# Altium PCB SQUIDCtr_Rev1.PcbDoc (part 3 of 4)
Units mil, origin at the board's own origin, x right, y up, seen from the top; angles counter-clockwise.
Board outline 5863.43 x 2940 mil, 6 copper layers (Top Layer, Internal Plane 1, Mid-Layer 1, InternalPlane 2, Mid-Layer 2, Bottom Layer), stack 62.5 mil thick; 614 components, 341 nets, 1601 pads, 475 vias.
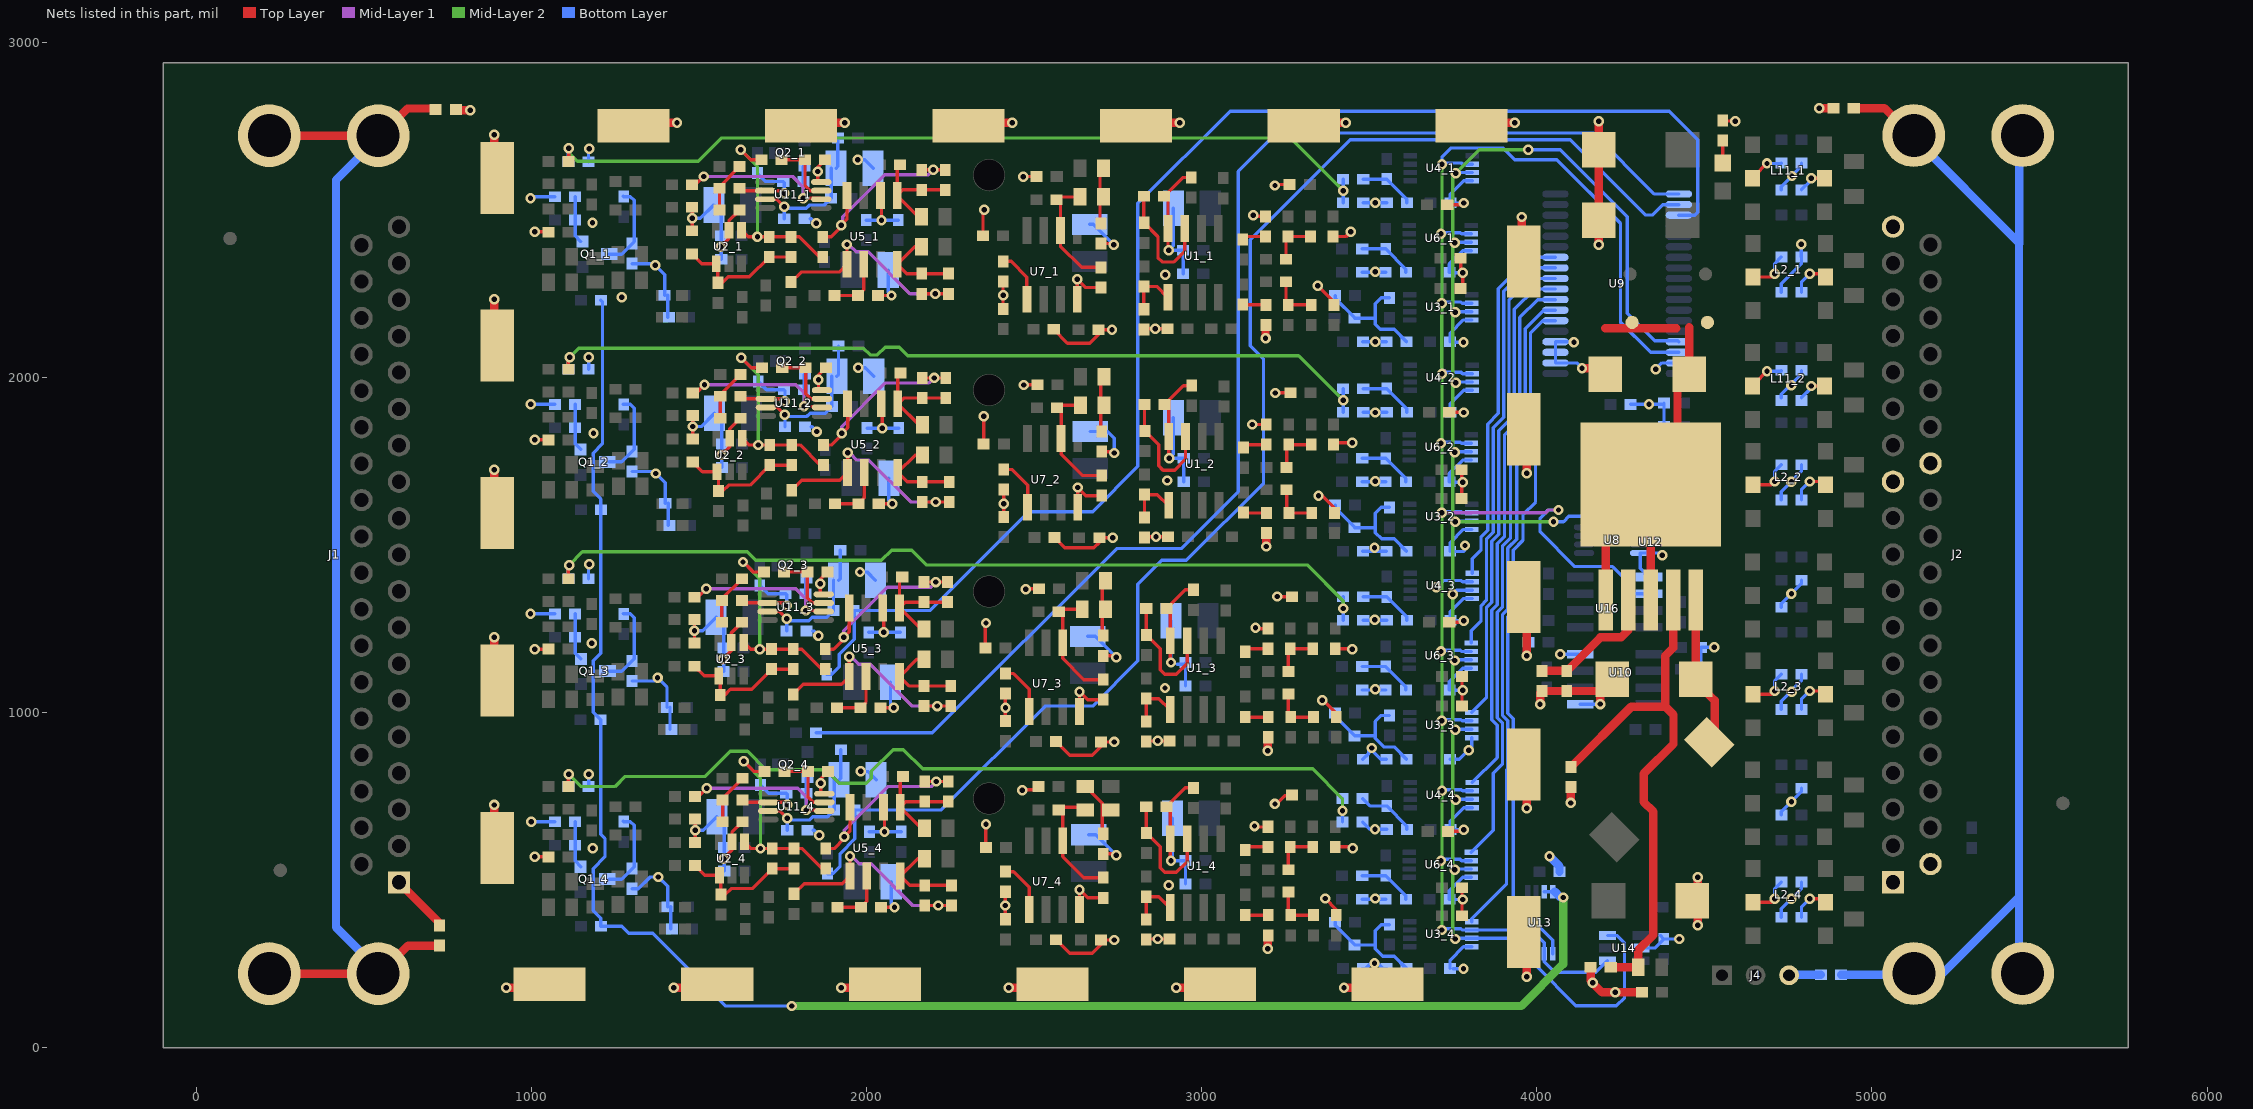
[diagram p7: the nets of this part, all layers, seen from the top]

## Via types
v1: diameter 31, hole 16, Top Layer to Bottom Layer, tented both sides, 475 vias

## Nets (pads, with @x,y where several pads share a name; then routed paths per layer and width w, separated by ;. In a path a pad name is that pad's centre, name@x,y a point inside that pad or via, vN(x,y) a via of type N, cw(c..) or ccw(c..) an arc to the next point about the centre after c; other vN are vias at no path point) (continued)
ENCH3.ENFEEDBACK: R33_3.2 R74_3.1 U9.21 | length 4137.8
  Bottom Layer w10: R74_3.1@1882,1115 1897,1115 1919.39,1137.39 1919.39,1174.86 1963.5,1218.98 R33_3.2@1963.5,1303.5 ; R33_3.2@1962,1305 2189,1305 2484,1600 2675,1600 2810,1735 2810,2520 3085,2795 4395,2795 4480,2710 4480,2492.72 4472.01,2484.72 U9.21@4424.06,2484.72
ENCH3.ENFLUXBIAS: U4_3.5 U9.12 | length 1090.6
  Bottom Layer w10: U4_3.5@3807.5,1416 3807.5,1459.93 3834,1486.43 3834,1524.76 3854,1544.76 3854,1861.5 3885.5,1893 3885.5,2264.99 3979.25,2358.74 U9.12@4055.94,2358.74
ENCH3.ENOFFSET: U6_3.5 U9.11 | length 1273.5
  Bottom Layer w10: U6_3.5@3804.5,1208 3804.5,1244.5 3834,1274 3834,1319.76 3850,1335.76 3850,1518.14 3870,1538.14 3870,1850 3901.5,1881.5 3901.5,2258.36 3970.38,2327.24 U9.11@4055.94,2327.24
ENCH3.ENSQUIDBIAS: U3_3.5 U9.10 | length 1442.1
  Bottom Layer w10: U3_3.5@3806.5,1001 3850,1044.5 3850,1313.14 3866,1329.14 3866,1511.51 3887,1532.51 3887,1842 3917.5,1872.5 3917.5,2232.5 3980.75,2295.75 U9.10@4055.94,2295.75
ENCH4.DISCHARGE: R34_4.1 U9.19 | length 3950.4
  Bottom Layer w10: R34_4.1@1850,940 2197,940 2747,1490 2940,1490 3110,1660 3110,2615 3225,2730 4168.94,2730 4351.22,2547.72 U9.19@4424.06,2547.72
ENCH4.ENFEEDBACK: R33_4.2 R74_4.1 U9.20 | length 4241.6
  Bottom Layer w10: R74_4.1@1884,520 1899,520 1921.39,542.39 1921.39,579.86 1965.5,623.98 R33_4.2@1965.5,708.5 ; R33_4.2@1964,710 2224,710 2534,1020 2675,1020 2810,1155 2810,1383.83 2881.17,1455 2955,1455 3185,1685 3185,2055.37 3145,2095.37 3145,2411 3444,2710 4100,2710 4325,2485 4345,2485 4376.22,2516.22 U9.20@4424.06,2516.22
ENCH4.ENFLUXBIAS: U4_4.5 U9.9 | length 1624.6
  Bottom Layer w10: U4_4.5@3807.5,792 3882,866.5 3882,962.49 3866,978.49 3866,1306.51 3882,1322.51 3882,1504.88 3904,1526.88 3904,1829 3933.5,1858.5 3933.5,2203.5 3994.25,2264.25 U9.9@4055.94,2264.25
ENCH4.ENOFFSET: U6_4.5 U9.8 | length 1797.3
  Bottom Layer w10: U6_4.5@3804.5,584 3870,649.5 3870,820 3898,848 3898,969.12 3882,985.12 3882,1299.88 3898,1315.88 3898,1498.25 3922,1522.25 3922,1822 3949.5,1849.5 3949.5,2179.5 4002.76,2232.76 U9.8@4055.94,2232.76
ENCH4.ENSQUIDBIAS: U3_4.5 U9.7 | length 1961.2
  Bottom Layer w10: U3_4.5@3806.5,377 3806.5,386 3910,489.5 3910,830 3914,834 3914,975.75 3898,991.75 3898,1293.25 3914,1309.25 3914,1491.63 3940,1517.63 3940,1810 3965.5,1835.5 3965.5,2145.5 4021.26,2201.26 U9.7@4055.94,2201.26
ENHEATER: U9.6 U13.5 | length 2037.9
  Bottom Layer w10: U13.5@4048,281 4048,322 3930,440 3930,982.37 3914,998.37 3914,1286.63 3930,1302.63 3930,1485 3959,1514 3959,1591.25 3996.5,1628.75 3996.5,1743.5 3981.5,1758.5 3981.5,2133.55 4017.71,2169.76 U9.6@4055.94,2169.76
FLUX_BIAS_FILTERED_1: C26_1.1 C46_1.1 R23_1.2 R38_1.1 | length 2578.5
  Top Layer w10: R38_1.1@1111,2645 1112,2646 v1(1112,2684)
  Mid-Layer 2 w10: v1(1112,2684) 1112,2671 1138,2645 1498,2645 1568,2715 3264.5,2715 v1(3422.5,2557)
  Bottom Layer w10: C26_1.1@1111,2644 1111,2683 v1(1112,2684) ; C46_1.1@3422.5,2522 v1(3422.5,2557) R23_1.2@3422.5,2592
FLUX_BIAS_FILTERED_2: C26_2.1 C46_2.1 R23_2.2 R38_2.1 | length 2547.3
  Top Layer w10: R38_2.1@1111,2025 1111,2057 v1(1115,2061)
  Mid-Layer 2 w10: v1(1115,2061) 1141.5,2087.5 1991.02,2087.5 2011.02,2067.5 2032.98,2067.5 2055.98,2090.5 2097.98,2090.5 2123.48,2065 3289.5,2065 v1(3422.5,1932)
  Bottom Layer w10: C26_2.1@1111,2025 1111,2057 v1(1115,2061) ; C46_2.1@3422.5,1897 v1(3422.5,1932) R23_2.2@3422.5,1967
FLUX_BIAS_FILTERED_3: C26_3.1 C46_3.1 R23_3.2 R38_3.1 | length 2585.8
  Top Layer w10: R38_3.1@1111,1400 1111,1438 v1(1113,1440)
  Mid-Layer 2 w10: v1(1113,1440) 1153,1480 1645,1480 1670,1455 2045,1455 2075,1485 2135,1485 2179,1441 3315,1441 3422.5,1333.5 v1(3422.5,1311)
  Bottom Layer w10: C26_3.1@1111,1400 1111,1438 v1(1113,1440) ; C46_3.1@3422.5,1276 v1(3422.5,1311) R23_3.2@3422.5,1346
FLUX_BIAS_FILTERED_4: C26_4.1 C46_4.1 R23_4.2 R38_4.1 | length 2703.9
  Top Layer w10: R38_4.1@1111,780 1111,816 v1(1112,817) ; v1(3420.5,708) v1@3422.5,710
  Mid-Layer 2 w10: v1(1112,817) 1149,780 1250,780 1280,810 1519,810 1594,885 1645.5,885 1700.5,830 1879,830 1919,790 2000,790 2015,805 2015,825 2080,890 2110,890 2167.5,832.5 3332,832.5 3420.5,744 v1(3420.5,708)
  Bottom Layer w10: C26_4.1@1111,780 1112,781 v1(1112,817) ; C46_4.1@3420.5,674 v1(3420.5,708) R23_4.2@3420.5,744
GND: C1.1 C2.1 C4.1 C5_1.1 C5_2.1 C5_3.1 C5_4.1 C6_1.1 C6_2.1 C6_3.1 C6_4.1 C7_1.1 C7_2.1 C7_3.1 C7_4.1 C8_1.1 C8_2.1 C8_3.1 C8_4.1 C9_1.1 C9_2.1 C9_3.1 C9_4.1 C10.1 C11_1.2 C11_2.2 C11_3.2 C11_4.2 C12_1.2 C12_2.2 C12_3.2 C12_4.2 C13_1.2 C13_2.2 C13_3.2 C13_4.2 C14_1.1 C14_2.1 C14_3.1 C14_4.1 C15_1.2 C15_2.2 C15_3.2 C15_4.2 C16_1.1 C16_2.1 C16_3.1 C16_4.1 C17_1.1 C17_2.1 C17_3.1 C17_4.1 C18_1.1 C18_2.1 C18_3.1 C18_4.1 C19_1.1 C19_2.1 C19_3.1 C19_4.1 C20_1.1 C20_2.1 C20_3.1 C20_4.1 C21_1.1 C21_2.1 C21_3.1 C21_4.1 C22.1 C24.2 C25.2 C26_1.2 C26_2.2 C26_3.2 C26_4.2 C27.2 C28.2 C29.2 C30.1 C31.1 C32.1 C35_1.2 C35_2.2 C35_3.2 C35_4.2 C36_1.1 C36_2.1 C36_3.1 C36_4.1 C37_1.1 C37_2.1 C37_3.1 C37_4.1 C38_1.1 C38_2.1 C38_3.1 C38_4.1 C39_1.1 C39_2.1 C39_3.1 C39_4.1 C41_1.1 C41_2.1 C41_3.1 C41_4.1 C42_1.1 C42_2.1 C42_3.1 C42_4.1 C44.1 C45_1.1 C45_2.1 C45_3.1 C45_4.1 C46_1.2 C46_2.2 C46_3.2 C46_4.2 C47_1.1 C47_2.1 C47_3.1 C47_4.1 C48_1.1 C48_2.1 C48_3.1 C48_4.1 C49_1.2 C49_2.2 C49_3.2 C49_4.2 C50_1.2 C50_2.2 C50_3.2 C50_4.2 C51_1.2 C51_2.2 C51_3.2 C51_4.2 C52_1.1 C52_2.1 C52_3.1 C52_4.1 C53_1.1 C53_2.1 C53_3.1 C53_4.1 C54_1.1 C54_2.1 C54_3.1 C54_4.1 C55.1 C56.1 C57.1 C58_1.2 C58_2.2 C58_3.2 C58_4.2 C59_1.2 C59_2.2 C59_3.2 C59_4.2 C60_1.1 C60_2.1 C60_3.1 C60_4.1 C61_1.2 C61_2.2 C61_3.2 C61_4.2 C62_1.2 C62_2.2 C62_3.2 C62_4.2 C63_1.1 C63_2.1 C63_3.1 C63_4.1 C64_1.1 C64_2.1 C64_3.1 C64_4.1 C65_1.1 C65_2.1 C65_3.1 C65_4.1 C66_1.1 C66_2.1 C66_3.1 C66_4.1 C67_1.1 C67_2.1 C67_3.1 C67_4.1 C68_1.1 C68_2.1 C68_3.1 C68_4.1 C69_1.1 C69_2.1 C69_3.1 C69_4.1 J1.1 J2.1 J2.12 J2.19 J2.20 J2.31 J4.3 R9_1.2 R9_2.2 R9_3.2 R9_4.2 R16.2 R17.1 R32.2 R42.1 R43_1.2 R43_2.2 R43_3.2 R43_4.2 R46_1.2 R46_2.2 R46_3.2 R46_4.2 R47_1.1 R47_2.1 R47_3.1 R47_4.1 R48_1.2 R48_2.2 R48_3.2 R48_4.2 R65_1.1 R65_2.1 R65_3.1 R65_4.1 R66.1 R68.1 R73.1 R77_1.1 R77_2.1 R77_3.1 R77_4.1 R78_1.2 R78_2.2 R78_3.2 R78_4.2 R79_1.1 R79_2.1 R79_3.1 R79_4.1 R80_1.2 R80_2.2 R80_3.2 R80_4.2 R85.2 SH1.1 SH2.1 SH3.1 SH4.1 SH5.1 SH6.1 SH8.1 SH9.1 SH10.1 SH11.1 SH12.1 SH13.1 SH14.1 SH16.1 SH17.1 SH18.1 SH19.1 SH20.1 SH21.1 SH22.1 SH23.1 SH24.1 U1_1.4 U1_2.4 U1_3.4 U1_4.4 U2_1.2 U2_2.2 U2_3.2 U2_4.2 U3_1.8 U3_2.8 U3_3.8 U3_4.8 U4_1.8 U4_2.8 U4_3.8 U4_4.8 U5_1.6 U5_2.6 U5_3.6 U5_4.6 U6_1.8 U6_2.8 U6_3.8 U6_4.8 U7_1.4 U7_2.4 U7_3.4 U7_4.4 U8.4 U9.2 U9.3 U9.4 U9.35 U10.5 U10.8 U11_1.4 U11_2.4 U11_3.4 U11_4.4 U13.8 U14.2 U16.5 | length 21040.5
  Top Layer w10: R73.1@726.57,365 R73.1@726.57,372.72 ; v1(1011,570) R48_4.2@1051,570 ; v1(1011,1190) R48_3.2@1051,1190 ; v1(1011,1815) R48_2.2@1051,1815 ; v1(1011,2435) R48_1.2@1051,2435 ; C9_1.1@1480,2438 v1(1480,2475) C8_1.1@1480,2508 ; C9_2.1@1482,1817 v1(1482,1854) C8_2.1@1482,1887 ; C9_3.1@1487,1208 v1(1487,1245) C8_3.1@1487,1278 ; C9_4.1@1489,613 v1(1489,650) C8_4.1@1489,683 ; v1(1565,2390) 1590,2415 U2_1.2@1590,2440 1590,2468 C35_1.2@1622,2500 ; v1(1567,1769) 1592,1794 U2_2.2@1592,1819 1592,1847 C35_2.2@1624,1879 ; v1(1572,1160) 1597,1185 U2_3.2@1597,1210 1597,1238 C35_3.2@1629,1270 ; v1(1574,565) 1599,590 U2_4.2@1599,615 1599,643 C35_4.2@1631,675 ; U11_1.4@1855,2585 v1(1855,2615) 1855,2628 C36_1.1@1877,2650 ; U11_2.4@1857,1964 v1(1857,1994) 1857,2007 C36_2.1@1879,2029 ; U11_3.4@1862,1355 v1(1862,1385) 1862,1398 C36_3.1@1884,1420 ; U11_4.4@1864,760 v1(1864,790) 1864,803 C36_4.1@1886,825 ; C7_1.1@2035,2245 v1(2075,2245) ; C7_2.1@2037,1624 v1(2077,1624) ; C7_3.1@2042,1015 v1(2082,1015) ; U5_1.6@2042,2543 2045,2540 v1(2045,2470) ; C7_4.1@2044,420 v1(2084,420) ; U5_2.6@2044,1922 2047,1919 v1(2047,1849) ; U5_3.6@2049,1313 2052,1310 v1(2052,1240) ; U5_4.6@2051,718 2054,715 v1(2054,645) ; R46_1.2@2348,2423 v1@2348,2501 ; R46_2.2@2350,1802 v1(2350,1885) ; R46_3.2@2355,1193 v1@2355,1268 ; R46_4.2@2356,609 v1@2356,667 ; C21_1.1@2408,2205 2407.5,2205.5 2407.5,2286.5 C52_1.1@2408,2287 ; C21_2.1@2410,1584 2409.5,1584.5 v1@2409.5,1622 ; C52_2.1@2410,1666 2409.5,1665.5 v1@2409.5,1622 ; v1@2411.5,1624 v1@2409.5,1622 ; C21_4.1@2415,384 2414.5,384.5 v1@2414.5,422 ; C52_4.1@2415,466 2414.5,465.5 v1@2414.5,422 ; C21_3.1@2415,975 2414.5,975.5 v1@2414.5,1013 ; C52_3.1@2415,1057 2414.5,1056.5 v1@2414.5,1013 ; v1@2416.5,424 v1@2414.5,422 ; v1@2416.5,1015 v1@2414.5,1013 ; v1(2465,769) 2465,762 2473,770 2503,770 C53_4.1@2513,780 ; v1(2468,2599) 2469,2600 C53_1.1@2508,2600 ; v1(2470,1978) 2471,1979 C53_2.1@2510,1979 ; v1(2475,1369) 2476,1370 C53_3.1@2515,1370 ; C18_1.1@2559,2144 2600,2103 2667,2103 2693,2129 R47_1.1@2693,2143 v1(2733,2143) ; C18_2.1@2561,1523 2592,1492 2679,1492 2695,1508 R47_2.1@2695,1522 v1(2735,1522) ; C18_4.1@2566,323 2607,282 2674,282 2700,308 R47_4.1@2700,322 v1(2740,322) ; C18_3.1@2566,914 2607,873 2674,873 2700,899 R47_3.1@2700,913 v1(2740,913) ; U7_1.4@2629,2234 v1(2629,2293) 2653,2269 R65_1.1@2700,2269 ; U7_2.4@2631,1613 v1(2631,1672) 2655,1648 R65_2.1@2702,1648 ; U7_4.4@2636,413 v1(2636,472) 2660,448 R65_4.1@2707,448 ; U7_3.4@2636,1004 v1(2636,1063) 2660,1039 R65_3.1@2707,1039 ; C54_1.1@2700,2400 v1@2734,2400 ; C54_2.1@2702,1779 v1@2736,1779 ; C54_4.1@2707,579 v1@2741,579 ; C54_3.1@2707,1170 v1@2741,1170 ; C17_1.1@2830,2146 R9_1.2@2898,2146 v1(2862,2146) ; C17_2.1@2832,1525 R9_2.2@2900,1525 v1(2864,1525) ; C17_4.1@2837,325 R9_4.2@2905,325 v1(2869,325) ; C17_3.1@2837,916 R9_3.2@2905,916 v1(2869,916) ; v1(2902,2380) 2900,2382 U1_1.4@2900,2445 2900,2553 2944,2597 R43_1.2@2969,2597 ; v1(2904,1759) 2902,1761 U1_2.4@2902,1824 2902,1932 2946,1976 R43_2.2@2971,1976 ; v1(2909,559) 2907,561 U1_4.4@2907,624 2907,732 2951,776 R43_4.2@2976,776 ; v1(2909,1150) 2907,1152 U1_3.4@2907,1215 2907,1323 2951,1367 R43_3.2@2976,1367 ; v1(3154,2484) 3157,2481 C48_1.1@3191,2481 ; v1@3156,1863 3159,1860 C48_2.1@3193,1860 ; v1(3158,662) 3161,659 C48_4.1@3195,659 ; v1(3161,1254) 3164,1251 C48_3.1@3198,1251 ; v1(3219,728) 3224,728 3248,752 C60_4.1@3264,752 ; v1(3219,2573) v1@3219,2582 ; v1@3219,2576 C60_1.1@3263,2576 ; v1@3220,1955 C60_2.1@3265,1955 ; v1@3226,1346 C60_3.1@3270,1346 ; v1(3226,1347) v1@3226,1352 ; v1(3347,2274) 3395,2226 C16_1.1@3395,2217 ; v1(3349,1647) 3356,1647 3358,1649 3397,1610 C16_2.1@3397,1596 ; v1@3360,1041 3402,999 C16_3.1@3402,987 ; v1(3369,446) 3402,413 C16_4.1@3402,396 ; C45_1.1@3392,2421 3431,2421 v1(3445,2435) ; C45_2.1@3394,1806 v1(3450,1806) ; C45_4.1@3399,600 3447,600 v1(3451,596) ; C45_3.1@3399,1191 3449,1191 v1(3450,1190) ; C67_1.1@3733,2516 3777.5,2516 v1(3782.5,2521) ; C67_4.1@3735,646 3777.5,646 v1(3782.5,651) ; C67_3.1@3739,1270 3777.5,1270 v1(3782.5,1275) ; C67_2.1@3739,1897 3781.5,1897 v1(3782.5,1896) ; C68_1.1@3773,2260 3779.5,2266.5 v1(3779.5,2313) 3773,2319.5 C69_1.1@3773,2356 ; C68_2.1@3775,1634 3776,1635 C69_2.1@3776,1725 ; C68_4.1@3776,393 C68_4.1@3777,394 C69_4.1@3777,478 ; C68_3.1@3777,1020 C69_3.1@3777,1108 ; R85.2@4555,2767 4556.62,2765.38 v1(4592.85,2765.38)
  Top Layer w25: J1.1@605.5,493.8 R73.1@726.57,372.72 ; R42.1@773,2798 v1(818,2798) ; SH1.1@890,603 v1(890,725) ; SH24.1@890,1103 v1(890,1225) ; SH23.1@890,1603 v1(890,1725) ; SH22.1@890,2103 v1(890,2234) ; v1(890,2725) 890,2605 SH21.1@899,2596 ; v1(925,180) SH2.1@1078,180 ; SH20.1@1313,2760 v1(1435,2760) ; SH20.1@1336,2752 SH20.1@1344,2760 ; v1(1425,180) SH3.1@1547,180 ; SH19.1@1805,2752 1813,2760 v1(1935,2760) ; v1(1925,180) SH4.1@2047,180 ; SH18.1@2305,2730 SH18.1@2305,2752 ; SH18.1@2313,2760 v1(2435,2760) ; v1(2425,180) SH5.1@2547,180 ; SH17.1@2813,2760 v1(2935,2760) ; v1(2925,180) SH6.1@3047,180 ; v1(3191,2117) 3191,2156 C19_1.1@3192,2157 ; v1(3193,1496) 3193,1535 C19_2.1@3194,1536 ; v1(3198,296) 3198,335 C19_4.1@3199,336 ; v1(3198,887) 3198,926 C19_3.1@3199,927 ; SH16.1@3308,2760 v1(3430,2760) ; v1(3425,180) SH8.1@3547,180 ; SH14.1@3813,2760 v1(3935,2760) ; SH13.1@3955,2357.12 v1(3955,2479.12) ; v1@3970,210 SH9.1@3970,337 ; v1(3970,715) SH10.1@3970,837 ; v1(3970,1170) SH11.1@3970,1337 ; v1(3970,1715) SH12.1@3970,1837 ; v1(4010,1025) 4010,1059 R68.1@4016,1065 C57.1@4090,1065 4190,1065 v1(4190,1026) ; v1(4102,731) C56.1@4102,778 ; v1(4135,2028) 4187,2028 C28.2@4205,2010 ; C55.1@4161,241 4161,200 4195,166 C4.1@4314,166 ; C29.2@4181,2466 C29.2@4185,2470 C27.2@4185,2680 v1(4185,2765) ; v1(4185,2396) C29.2@4185,2460 ; C24.2@4436,411 C24.2@4464,439 ; v1(4480,366) 4481,367 v1(4481,509) ; v1(4843,2804) R66.1@4886,2804
  Bottom Layer w10: v1(998,1295) C59_3.2@1071,1295 ; v1(998,2535) 1003,2540 C59_1.2@1071,2540 ; v1(999,1920) C59_2.2@1071,1920 ; v1(1000,675) C59_4.2@1071,675 ; C26_4.2@1171,780 1172,781 v1(1172,817) ; C26_3.2@1171,1400 1171,1441 v1(1173,1443) ; C26_2.2@1171,2025 1172,2026 v1(1172,2061) ; C26_1.2@1171,2644 1171,2681 v1(1173,2683) ; C58_4.2@1301,475 1320,475 1355,510 v1(1379,510) 1407,482 C62_4.2@1407,421 ; C58_3.2@1301,1095 v1@1367,1095 ; C58_2.2@1301,1720 v1@1367,1720 ; C58_1.2@1301,2340 v1@1365,2340 ; v1(1370,2335) 1398,2307 C62_1.2@1398,2246 ; v1(1372,1714) 1400,1686 C62_2.2@1400,1625 ; v1(1377,1105) 1405,1077 C62_3.2@1405,1016 ; C61_1.2@1407,2180 C62_1.2@1407,2246 ; C61_2.2@1409,1559 C62_2.2@1409,1625 ; C61_3.2@1414,950 C62_3.2@1414,1016 ; C61_4.2@1416,355 C62_4.2@1416,421 ; v1(1480,2475) 1504.88,2475 C63_1.1@1544.88,2515 ; v1(1482,1854) 1506.88,1854 C63_2.1@1546.88,1894 ; v1(1487,1245) 1511.88,1245 C63_3.1@1551.88,1285 ; v1(1489,650) 1513.88,650 C63_4.1@1553.88,690 ; C5_1.1@1567,2353 C6_1.1@1567,2423 C63_1.1@1567,2492.88 ; C5_2.1@1569,1732 C6_2.1@1569,1802 C63_2.1@1569,1871.88 ; C5_3.1@1574,1123 C6_3.1@1574,1193 C63_3.1@1574,1262.88 ; C5_4.1@1576,528 C6_4.1@1576,598 C63_4.1@1576,667.88 ; C37_1.1@1832.87,2474.13 1835.87,2474.13 v1(1850,2460) ; C37_2.1@1834.87,1853.13 1837.87,1853.13 v1(1852,1839) ; C37_3.1@1839.87,1244.13 1842.87,1244.13 v1(1857,1230) ; C37_4.1@1841.87,649.13 1844.87,649.13 v1(1859,635) ; v1(1974,2650) 1995.12,2650 C38_1.1@2020.12,2625 ; v1(1976,2029) 1997.12,2029 C38_2.1@2022.12,2004 ; v1(1981,1420) 2002.12,1420 C38_3.1@2027.12,1395 ; v1(1983,825) 2004.12,825 C38_4.1@2029.12,800 ; C42_1.1@2000,2470 v1(2045,2470) C41_1.1@2095,2470 ; C42_2.1@2002,1849 v1(2047,1849) C41_2.1@2097,1849 ; C42_3.1@2007,1240 v1(2052,1240) C41_3.1@2102,1240 ; C42_4.1@2009,645 v1(2054,645) C41_4.1@2104,645 ; C64_1.1@2065.12,2321 2065.12,2254.88 v1(2075,2245) ; C64_2.1@2067.12,1700 2067.12,1633.88 v1(2077,1624) ; C64_3.1@2072.12,1091 2072.12,1024.88 v1(2082,1015) ; C64_4.1@2074.12,496 2074.12,429.88 v1(2084,420) ; C66_3.1@2661,1228.12 2682.88,1228.12 v1(2745,1166) ; C66_4.1@2664,636.12 2683.88,636.12 v1(2745,575) ; C66_1.1@2666,2457.12 2676.88,2457.12 v1(2738,2396) ; C66_2.1@2668,1839.12 2719.88,1839.12 2740,1819 v1(2740,1775) ; C65_3.1@2908.88,1275 2908.88,1150.12 v1(2909,1150) ; C65_4.1@2912.88,685 2912.88,562.88 v1(2909,559) C39_4.1@2952,559 C20_4.1@2952,489 ; C65_2.1@2915.88,1880 2915.88,1770.88 v1(2904,1759) C39_2.1@2947,1759 C20_2.1@2947,1689 ; C65_1.1@2915.88,2505 2915.88,2393.88 v1(2902,2380) C39_1.1@2945,2380 C20_1.1@2945,2310 ; 2928,1145 C39_3.1@2952,1145 ; C20_3.1@2952,1080 C39_3.1@2952,1150 ; C51_4.2@3479.5,444 C50_4.2@3549.5,444 ; C51_3.2@3479.5,1068 C50_3.2@3549.5,1068 ; C51_2.2@3479.5,1689 C50_2.2@3549.5,1689 ; C51_1.2@3479.5,2314 C50_1.2@3549.5,2314 ; C46_4.2@3480.5,674 3502.5,652 C15_4.2@3552.5,652 ; C13_4.2@3481.5,237 3490,237 3515.5,262.5 3541,237 C49_4.2@3551.5,237 ; C13_3.2@3481.5,861 3499,878.5 3499,893 3501,895 v1(3508,895) ; C13_2.2@3481.5,1482 C49_2.2@3551.5,1482 ; C13_1.2@3481.5,2107 C49_1.2@3551.5,2107 ; C46_3.2@3482.5,1276 C15_3.2@3552.5,1276 ; C46_2.2@3482.5,1897 C15_2.2@3552.5,1897 ; C46_1.2@3482.5,2522 C15_1.2@3552.5,2522 ; v1@3501.5,893.5 3534,861 C49_3.2@3551.5,861 ; C11_4.2@3741.5,237 3741.5,262 3781.5,302 U3_4.8@3806.5,302 ; C11_3.2@3741.5,861 3768.61,861 3806.5,898.89 U3_3.8@3806.5,926 ; C11_2.2@3741.5,1482 3741.5,1507 3781.5,1547 U3_2.8@3806.5,1547 ; C11_1.2@3741.5,2107 3741.5,2132 3781.5,2172 U3_1.8@3806.5,2172 ; C12_4.2@3742.5,652 3742.5,677 3782.5,717 U4_4.8@3807.5,717 ; C12_3.2@3742.5,1276 3742.5,1301 3782.5,1341 U4_3.8@3807.5,1341 ; C12_2.2@3742.5,1897 3742.5,1922 3782.5,1962 U4_2.8@3807.5,1962 ; C12_1.2@3742.5,2522 3742.5,2547 3782.5,2587 U4_1.8@3807.5,2587 ; C11_4.2@3751,236 v1(3781.5,236) ; C11_2.2@3751,1481 3781.5,1481 3786,1485.5 v1(3786,1499) ; C11_1.2@3751,2106 v1(3781.5,2106) ; C12_4.2@3752,651 v1(3782.5,651) ; C12_3.2@3752,1275 v1(3782.5,1275) ; C12_2.2@3752,1896 v1(3782.5,1896) ; C12_1.2@3752,2521 v1(3782.5,2521) ; v1(3779.5,443) 3749,443 3748,444 C14_4.1@3739.5,444 3739.5,469 3779.5,509 U6_4.8@3804.5,509 ; v1(3779.5,1067) 3749,1067 3748,1068 C14_3.1@3739.5,1068 3739.5,1093 3779.5,1133 U6_3.8@3804.5,1133 ; v1(3779.5,1688) 3749,1688 3748,1689 C14_2.1@3739.5,1689 3739.5,1714 3779.5,1754 U6_2.8@3804.5,1754 ; v1(3779.5,2313) 3749,2313 3748,2314 C14_1.1@3739.5,2314 3739.5,2339 3779.5,2379 U6_1.8@3804.5,2379 ; v1@3970,215 v1@3973,218 ; v1(3970,1170) 3975,1175 C44.1@3975,1210 C10.1@3975,1275 ; v1(4070,1175) U10.8@4130,1175 ; v1(4111.06,2105) 4109.29,2106.77 U9.4@4055.94,2106.77 U9.3@4055.94,2075.28 U9.2@4055.94,2043.78 4119.22,2043.78 v1(4135,2028) ; U10.5@4130,1025 4189,1025 v1(4190,1026) ; R16.2@4280,1920 v1(4335,1920) 4376,1920 C32.1@4380,1924 C31.1@4380,1854 ; U14.2@4311,298 4352,298 C30.1@4379,325 ; U16.5@4335,1405 4308.66,1431.34 U8.4@4308.66,1476.61 4368.39,1476.61 v1(4375,1470) ; v1(4355,2025) 4373.78,2043.78 U9.35@4424.06,2043.78 ; C30.1@4368.5,335.5 C30.1@4379,325 ; v1(4425,325) C30.1@4379,325 ; R32.2@4435,420 4446,420 4480,386 v1(4480,366) ; C2.1@4490,1130 C1.1@4490,1195 v1(4530,1195) ; R78_4.2@4730,390 4730,415 4790,475 R77_4.1@4790,495 ; R80_4.2@4730,695 4730,705 4790,765 R79_4.1@4790,775 ; R78_3.2@4730,1010 4730,1035 4790,1095 R77_3.1@4790,1115 ; R80_3.2@4730,1315 4730,1325 4790,1385 R79_3.1@4790,1395 ; R78_2.2@4730,1635 4730,1660 4790,1720 R77_2.1@4790,1740 ; R80_2.2@4730,1940 4730,1950 4790,2010 R79_2.1@4790,2020 ; R78_1.2@4730,2255 4730,2280 4790,2340 R77_1.1@4790,2360 4789,2361 v1(4789,2398) ; R80_1.2@4730,2560 4730,2570 4790,2630 R79_1.1@4790,2640 ; J4.3@4753,217 J4.3@4754,218
  Bottom Layer w20: v1@3973,218 U13.8@3973,281
  Bottom Layer w25: v1(4038,572) 4068,542 C22.1@4068,526 ; J4.3@4754,218 R17.1@4848,218
  other v1: 4234,166 4167,194 3970,212 3516,253 2414,425 4760,445 3518.5,446 2902,485 1184,596 3517.5,652 2357,667 4760,735 3797,888 2415,1015 3360,1037 4761,1063 3518.5,1070 2891,1074 1181,1207 2357,1268 3516.5,1277 4760,1355 3516,1492 2410,1624 4760,1689 3518.5,1691 2898,1693 1186,1834 3151,1860 3518.5,1896 3220,1954 4760,1977 3518,2107 1270,2240 2408,2246 2892,2307 3518.5,2316 1183,2462 2352,2501 3518.5,2522 4761.56,2601.5
HEATERDACVOLTAGE: R6_1.2 R6_2.2 R6_3.2 R6_4.2 U13.3 U13.4 | length 5216.2
  Mid-Layer 2 w25: v1(1777,125) 3954,125 4079,250 v1(4079,449)
  Bottom Layer w10: R6_1.2@1208,2231 1212.5,2226.5 1212.5,1802.5 1185,1775 1185,1661 1208,1638 R6_2.2@1208,1606 1208,1178 1185,1155 1185,1001 R6_3.2@1207,979 1207,638 1220,625 1220,570 1185,535 1185,410 1208,387 R6_4.2@1208,363 1270,363 1291,342 1363,342 1580,125 v1(1777,125) ; U13.3@4023,466 U13.4@4048,466
  Bottom Layer w25: U13.4@4054,466 4071,449 v1(4079,449)
I2C.SCL: U3_1.6 U3_2.6 U3_3.6 U3_4.6 U4_1.6 U4_2.6 U4_3.6 U4_4.6 U6_1.6 U6_2.6 U6_3.6 U6_4.6 U9.34 U13.6 U14.4 U16.6 | length 5996.6
  Mid-Layer 1 w10: v1(3716.5,1597) 4027,1597 4035,1605 v1(4065,1605) ; v1(3717.5,2012) v1@3725.5,2020
  Mid-Layer 2 w10: v1(3700,1374) 3717.5,1374 ; v1(3716.5,352) 3717.5,353 v1(3717.5,767) 3717.5,1374 ; v1(3717.5,2637) 3717.5,2223 v1(3716.5,2222) 3716.5,2013 v1(3717.5,2012) 3717.5,1374
  Bottom Layer w10: v1@3700.25,1373.75 3721,1394.5 3775,1394.5 3778.5,1391 U4_3.6@3807.5,1391 ; v1(3714.5,559) 3718,562.5 3772,562.5 3775.5,559 U6_4.6@3804.5,559 ; v1(3714.5,1183) 3718,1186.5 3772,1186.5 3775.5,1183 U6_3.6@3804.5,1183 ; v1(3714.5,1804) 3718,1807.5 3772,1807.5 3775.5,1804 U6_2.6@3804.5,1804 ; v1(3714.5,2429) 3718,2432.5 3772,2432.5 3775.5,2429 U6_1.6@3804.5,2429 ; v1(3716.5,352) 3720,355.5 3774,355.5 3777.5,352 U3_4.6@3806.5,352 3985,352 4023,314 U13.6@4023,281 4023,257 4054,226 4176.5,226 U14.4@4211,260.5 ; v1(3716.5,976) 3720,979.5 3774,979.5 3777.5,976 U3_3.6@3806.5,976 ; v1(3716.5,1597) 3720,1600.5 3774,1600.5 3777.5,1597 U3_2.6@3806.5,1597 ; v1(3716.5,2222) 3720,2225.5 3774,2225.5 3777.5,2222 U3_1.6@3806.5,2222 ; v1(3717.5,767) 3721,770.5 3775,770.5 3778.5,767 U4_4.6@3807.5,767 ; v1(3717.5,2012) 3721,2015.5 3775,2015.5 3778.5,2012 U4_2.6@3807.5,2012 ; U4_1.6@3807.5,2637 3778.5,2637 3775,2640.5 3721,2640.5 v1(3717.5,2637) 3717.5,2659 3743.5,2685 3900,2685 3935,2650 4060,2650 4250,2460 4250,2165.55 4340.28,2075.28 U9.34@4424.06,2075.28 ; v1(4065,1605) 4035,1605 4010,1580 4010,1540 4113.69,1436.31 4226.31,1436.31 4276,1386.63 4276,1361.37 4282.37,1355 U16.6@4335,1355
I2C.SDA: U3_1.7 U3_2.7 U3_3.7 U3_4.7 U4_1.7 U4_2.7 U4_3.7 U4_4.7 U6_1.7 U6_2.7 U6_3.7 U6_4.7 U8.1 U9.33 U13.7 U14.6 | length 5386.7
  Mid-Layer 2 w10: v1(3757.5,325) 3749,333.5 v1(3749,1354) 3749,2600.5 v1(3758.5,2610) 3828.5,2680 v1(3975,2680) ; v1(3757.5,1570) v1(4050,1570)
  Bottom Layer w10: v1(3749,1354) 3749,1354.5 3760.5,1366 U4_3.7@3807.5,1366 ; v1(3755.5,532) 3757.5,534 U6_4.7@3804.5,534 ; v1(3755.5,1156) 3757.5,1158 U6_3.7@3804.5,1158 ; v1(3755.5,1777) 3757.5,1779 U6_2.7@3804.5,1779 ; v1(3755.5,2402) 3757.5,2404 U6_1.7@3804.5,2404 ; v1(3757.5,325) 3759.5,327 U3_4.7@3806.5,327 3982,327 3998,311 U13.7@3998,281 3998,245 4117,126 4238,126 4262,150 4262,313 4239.5,335.5 U14.6@4211,335.5 ; v1(3757.5,949) 3759.5,951 U3_3.7@3806.5,951 ; v1(3757.5,1570) 3759.5,1572 U3_2.7@3806.5,1572 ; v1(3757.5,2195) 3759.5,2197 U3_1.7@3806.5,2197 ; v1(3758.5,740) 3760.5,742 U4_4.7@3807.5,742 ; v1(3758.5,1985) 3760.5,1987 U4_2.7@3807.5,1987 ; v1(3758.5,2610) 3760.5,2612 U4_1.7@3807.5,2612 ; v1(3975,2680) 4070,2680 4270,2480 4270,2192.37 4352.37,2110 4420.83,2110 U9.33@4424.06,2106.77 ; v1(4050,1570) 4080,1570 4095.87,1585.87 4224.13,1585.87 4256.61,1553.39 U8.1@4308.66,1553.39
NetC3_1_1: C3_1.1 R50_1.1 R55_1.1 R71_1.1 U5_1.5 | length 341.1
  Top Layer w10: R71_1.1@2092,2635 U5_1.5@2092,2543 ; R55_1.1@2165,2480 2155,2480 U5_1.5@2092,2543 ; R50_1.1@2235,2560 C3_1.1@2165,2560 2109,2560 U5_1.5@2092,2543
NetC3_1_2: C3_1.2 R50_1.2 R54_1.1 U5_1.8 | length 588.4
  Top Layer w10: R54_1.1@1870,2420 1895,2420 1925,2450 v1@1930,2450 ; v1@1930,2460 1942,2472 U5_1.8@1942,2543 ; C3_1.2@2165,2620 v1(2200,2620) R50_1.2@2235,2620
  Mid-Layer 1 w10: v1@1930,2450 1930,2480 2055,2605 2185,2605 v1(2200,2620)
  other v1: 1925,2455
NetC3_2_1: C3_2.1 R50_2.1 R55_2.1 R71_2.1 U5_2.5 | length 341.1
  Top Layer w10: R71_2.1@2094,2014 U5_2.5@2094,1922 ; R55_2.1@2167,1859 2157,1859 U5_2.5@2094,1922 ; R50_2.1@2237,1939 C3_2.1@2167,1939 2111,1939 U5_2.5@2094,1922
NetC3_2_2: C3_2.2 R50_2.2 R54_2.1 U5_2.8 | length 585.5
  Top Layer w10: R54_2.1@1872,1799 1897,1799 1927,1829 v1@1932,1829 ; v1@1932,1839 1944,1851 U5_2.8@1944,1922 ; C3_2.2@2167,1999 v1(2202,1999) R50_2.2@2237,1999
  Mid-Layer 1 w10: v1(1927,1834) 1927,1854 2057,1984 2187,1984 v1(2202,1999)
NetC3_3_1: C3_3.1 R50_3.1 R55_3.1 R71_3.1 U5_3.5 | length 341.1
  Top Layer w10: R71_3.1@2099,1405 U5_3.5@2099,1313 ; R55_3.1@2172,1250 2162,1250 U5_3.5@2099,1313 ; R50_3.1@2242,1330 C3_3.1@2172,1330 2116,1330 U5_3.5@2099,1313
NetC3_3_2: C3_3.2 R50_3.2 R54_3.1 U5_3.8 | length 585.5
  Top Layer w10: R54_3.1@1877,1190 1902,1190 1932,1220 v1@1937,1220 ; v1@1937,1230 1949,1242 U5_3.8@1949,1313 ; C3_3.2@2172,1390 v1(2207,1390) R50_3.2@2242,1390
  Mid-Layer 1 w10: v1(1932,1225) 1932,1245 2062,1375 2192,1375 v1(2207,1390)
NetC3_4_1: C3_4.1 R50_4.1 R55_4.1 R71_4.1 U5_4.5 | length 341.1
  Top Layer w10: R71_4.1@2101,810 U5_4.5@2101,718 ; R55_4.1@2174,655 2164,655 U5_4.5@2101,718 ; R50_4.1@2244,735 C3_4.1@2174,735 2118,735 U5_4.5@2101,718
NetC3_4_2: C3_4.2 R50_4.2 R54_4.1 U5_4.8 | length 585.5
  Top Layer w10: R54_4.1@1879,595 1904,595 1934,625 v1@1939,625 ; v1@1939,635 1951,647 U5_4.8@1951,718 ; C3_4.2@2174,795 v1(2209,795) R50_4.2@2244,795
  Mid-Layer 1 w10: v1(1934,630) 1934,650 2064,780 2194,780 v1(2209,795)
NetC7_1_2: C7_1.2 R52_1.2 U5_1.2 | length 170
  Top Layer w10: R52_1.2@1905,2245 C7_1.2@1975,2245 1992,2262 U5_1.2@1992,2338
NetC7_2_2: C7_2.2 R52_2.2 U5_2.2 | length 170
  Top Layer w10: R52_2.2@1907,1624 C7_2.2@1977,1624 1994,1641 U5_2.2@1994,1717
NetC7_3_2: C7_3.2 R52_3.2 U5_3.2 | length 170
  Top Layer w10: R52_3.2@1912,1015 C7_3.2@1982,1015 1999,1032 U5_3.2@1999,1108
NetC7_4_2: C7_4.2 R52_4.2 U5_4.2 | length 170
  Top Layer w10: R52_4.2@1914,420 C7_4.2@1984,420 2001,437 U5_4.2@2001,513
NetC15_1_1: C15_1.1 R22_1.2 R23_1.1 | length 164.9
  Bottom Layer w10: R23_1.1@3482.5,2592 R22_1.2@3552.5,2592 3612.5,2532 C15_1.1@3612.5,2522
NetC15_2_1: C15_2.1 R22_2.2 R23_2.1 | length 164.9
  Bottom Layer w10: R23_2.1@3482.5,1967 R22_2.2@3552.5,1967 3612.5,1907 C15_2.1@3612.5,1897
NetC15_3_1: C15_3.1 R22_3.2 R23_3.1 | length 164.9
  Bottom Layer w10: R23_3.1@3482.5,1346 R22_3.2@3552.5,1346 3612.5,1286 C15_3.1@3612.5,1276
NetC15_4_1: C15_4.1 R22_4.2 R23_4.1 | length 176
  Bottom Layer w10: R23_4.1@3480.5,744 3502.5,722 R22_4.2@3552.5,722 3612.5,662 C15_4.1@3612.5,652
NetC17_1_2: C17_1.2 R69_1.1 U1_1.5 | length 153.3
  Top Layer w10: C17_1.2@2828,2204 R69_1.1@2828,2272 2866,2272 2898,2240 U1_1.5@2900,2240
NetC17_2_2: C17_2.2 R69_2.1 U1_2.5 | length 153.3
  Top Layer w10: C17_2.2@2830,1583 R69_2.1@2830,1651 2868,1651 2900,1619 U1_2.5@2902,1619
NetC17_3_2: C17_3.2 R69_3.1 U1_3.5 | length 153.3
  Top Layer w10: C17_3.2@2835,974 R69_3.1@2835,1042 2873,1042 2905,1010 U1_3.5@2907,1010
NetC17_4_2: C17_4.2 R69_4.1 U1_4.5 | length 153.3
  Top Layer w10: C17_4.2@2835,383 R69_4.1@2835,451 2873,451 2905,419 U1_4.5@2907,419
NetC19_1_2: C19_1.2 R14_1.2 | length 69.4
  Top Layer w10: R14_1.2@3123,2218 3124,2217 C19_1.2@3192,2217
NetC19_2_2: C19_2.2 R14_2.2 | length 69.4
  Top Layer w10: R14_2.2@3125,1597 3126,1596 C19_2.2@3194,1596
NetC19_3_2: C19_3.2 R14_3.2 | length 69.4
  Top Layer w10: R14_3.2@3130,988 3131,987 C19_3.2@3199,987
NetC19_4_2: C19_4.2 R14_4.2 | length 69.4
  Top Layer w10: R14_4.2@3130,397 3131,396 C19_4.2@3199,396
NetC23_1_1: C23_1.1 Q2_1.2 R30_1.2 U11_1.2 | length 542.7
  Top Layer w10: R30_1.2@1480,2575 1490,2575 v1(1515,2600) ; v1(1812,2535) 1862.87,2535 U11_1.2@1865.66,2532.2
  Mid-Layer 1 w10: v1(1515,2600) 1780,2600 1812,2568 v1(1812,2535)
  Bottom Layer w10: v1(1812,2535) C23_1.1@1812,2585 1812,2630 Q2_1.2@1815,2633
NetC23_1_2: C23_1.2 R29_1.2 R62_1.1 U11_1.6 | length 258.6
  Top Layer w10: R29_1.2@1622,2565 1629.2,2557.8 U11_1.6@1698.34,2557.8 1747.2,2557.8 v1(1755,2550)
  Bottom Layer w10: R62_1.1@1675,2610 1700,2585 C23_1.2@1752,2585 ; v1(1755,2550) C23_1.2@1755,2582
NetC23_2_1: C23_2.1 Q2_2.2 R30_2.2 U11_2.2 | length 547.4
  Top Layer w10: R30_2.2@1482,1954 1492,1954 v1(1517,1979) ; v1(1814,1914) 1864.87,1914 U11_2.2@1867.66,1911.2
  Mid-Layer 1 w10: v1(1517,1979) 1790,1979 1814,1955 v1(1814,1914)
  Bottom Layer w10: v1(1814,1914) C23_2.1@1814,1964 1814,2009 Q2_2.2@1817,2012
NetC23_2_2: C23_2.2 R29_2.2 R62_2.1 U11_2.6 | length 258.6
  Top Layer w10: R29_2.2@1624,1944 1631.2,1936.8 U11_2.6@1700.34,1936.8 1749.2,1936.8 v1(1757,1929)
  Bottom Layer w10: R62_2.1@1677,1989 1702,1964 C23_2.2@1754,1964 ; v1(1757,1929) C23_2.2@1757,1961
NetC23_3_1: C23_3.1 Q2_3.2 R30_3.2 U11_3.2 | length 543.8
  Top Layer w10: R30_3.2@1487,1345 1497,1345 v1(1522,1370) ; v1(1819,1305) 1869.87,1305 U11_3.2@1872.66,1302.2
  Mid-Layer 1 w10: v1(1522,1370) 1789,1370 1819,1340 v1(1819,1305)
  Bottom Layer w10: v1(1819,1305) C23_3.1@1819,1355 1819,1400 Q2_3.2@1822,1403
NetC23_3_2: C23_3.2 R29_3.2 R62_3.1 U11_3.6 | length 258.6
  Top Layer w10: R29_3.2@1629,1335 1636.2,1327.8 U11_3.6@1705.34,1327.8 1754.2,1327.8 v1(1762,1320)
  Bottom Layer w10: R62_3.1@1682,1380 1707,1355 C23_3.2@1759,1355 ; v1(1762,1320) C23_3.2@1762,1352
NetC23_4_1: C23_4.1 Q2_4.2 R30_4.2 U11_4.2 | length 546.2
  Top Layer w10: R30_4.2@1489,750 1499,750 v1(1524,775) ; v1(1821,710) 1871.87,710 U11_4.2@1874.66,707.2
  Mid-Layer 1 w10: v1(1524,775) 1795,775 1821,749 v1(1821,710)
  Bottom Layer w10: v1(1821,710) C23_4.1@1821,760 1821,805 Q2_4.2@1824,808
NetC23_4_2: C23_4.2 R29_4.2 R62_4.1 U11_4.6 | length 258.6
  Top Layer w10: R29_4.2@1631,740 1638.2,732.8 U11_4.6@1707.34,732.8 1756.2,732.8 v1(1764,725)
  Bottom Layer w10: R62_4.1@1684,785 1709,760 C23_4.2@1761,760 ; v1(1764,725) C23_4.2@1764,757
NetC25_1: C25.1 L3.2 U12.5 | length 441.1
  Top Layer w25: U12.5@4474.02,1336.5 4474.02,1100.98 C25.1@4475,1100 4475,1093 4531,1037 L3.2@4531,919
NetC28_1: C28.1 L5.1 L6.1 U12.1 U12.3 U12.6 | length 1505.6
  Top Layer w25: 4204,2147 4417,2147 ; U12.1@4205.98,1304.98 U12.1@4205.98,1336.5 4205.98,1546.97 U12.6@4340,1680.98 ; U12.3@4340,1336.5 U12.6@4340,1680.98 ; 4455,2150 C28.1@4455,2010 4420,1975 4420,1760.98 U12.6@4340,1680.98
NetC35_1_1: C35_1.1 R28_1.2 R29_1.1 | length 154.9
  Top Layer w10: C35_1.1@1562,2500 R29_1.1@1562,2565 1562,2570 R28_1.2@1622,2630
NetC35_2_1: C35_2.1 R28_2.2 R29_2.1 | length 154.9
  Top Layer w10: C35_2.1@1564,1879 R29_2.1@1564,1944 1564,1949 R28_2.2@1624,2009
NetC35_3_1: C35_3.1 R28_3.2 R29_3.1 | length 154.9
  Top Layer w10: C35_3.1@1569,1270 R29_3.1@1569,1335 1569,1340 R28_3.2@1629,1400
NetC35_4_1: C35_4.1 R28_4.2 R29_4.1 | length 154.9
  Top Layer w10: C35_4.1@1571,675 R29_4.1@1571,740 1571,745 R28_4.2@1631,805
NetC36_1_2: C36_1.2 R31_1.2 U11_1.3 | length 202
  Top Layer w10: R31_1.2@1747,2650 C36_1.2@1817,2650 1817,2573 1832.2,2557.8 U11_1.3@1865.66,2557.8
NetC36_2_2: C36_2.2 R31_2.2 U11_2.3 | length 202
  Top Layer w10: R31_2.2@1749,2029 C36_2.2@1819,2029 1819,1952 1834.2,1936.8 U11_2.3@1867.66,1936.8
NetC36_3_2: C36_3.2 R31_3.2 U11_3.3 | length 202
  Top Layer w10: R31_3.2@1754,1420 C36_3.2@1824,1420 1824,1343 1839.2,1327.8 U11_3.3@1872.66,1327.8
NetC36_4_2: C36_4.2 R31_4.2 U11_4.3 | length 202
  Top Layer w10: R31_4.2@1756,825 C36_4.2@1826,825 1826,748 1841.2,732.8 U11_4.3@1874.66,732.8
NetC37_1_2: C37_1.2 C38_1.2 R33_1.1 R61_1.1 U11_1.7 | length 438.4
  Top Layer w10: U11_1.7@1698.34,2532.2 1732.8,2532.2 v1(1755,2510)
  Bottom Layer w10: C37_1.2@1755,2474.13 v1(1755,2510) 1760,2505 1820.87,2505 1830.87,2515 1875,2515 R33_1.1@1895,2535 1895,2624.88 C38_1.2@1894.88,2625 ; C38_1.2@1909.88,2625 1915,2630.12 R61_1.1@1915,2715
NetC37_2_2: C37_2.2 C38_2.2 R33_2.1 R61_2.1 U11_2.7 | length 438.4
  Top Layer w10: U11_2.7@1700.34,1911.2 1734.8,1911.2 v1(1757,1889)
  Bottom Layer w10: C37_2.2@1757,1853.13 v1(1757,1889) 1762,1884 1822.87,1884 1832.87,1894 1877,1894 R33_2.1@1897,1914 1897,2003.88 C38_2.2@1896.88,2004 ; C38_2.2@1911.88,2004 1917,2009.12 R61_2.1@1917,2094
NetC37_3_2: C37_3.2 C38_3.2 R33_3.1 R61_3.1 U11_3.7 | length 438.4
  Top Layer w10: U11_3.7@1705.34,1302.2 1739.8,1302.2 v1(1762,1280)
  Bottom Layer w10: C37_3.2@1762,1244.13 v1(1762,1280) 1767,1275 1827.87,1275 1837.87,1285 1882,1285 R33_3.1@1902,1305 1902,1394.88 C38_3.2@1901.88,1395 ; C38_3.2@1916.88,1395 1922,1400.12 R61_3.1@1922,1485
NetC37_4_2: C37_4.2 C38_4.2 R33_4.1 R61_4.1 U11_4.7 | length 438.4
  Top Layer w10: U11_4.7@1707.34,707.2 1741.8,707.2 v1(1764,685)
  Bottom Layer w10: C37_4.2@1764,649.13 v1(1764,685) 1769,680 1829.87,680 1839.87,690 1884,690 R33_4.1@1904,710 1904,799.88 C38_4.2@1903.88,800 ; C38_4.2@1918.88,800 1924,805.12 R61_4.1@1924,890
NetC40_1_1: C40_1.1 R31_1.1 R54_1.2 R58_1.1 U2_1.1 | length 630.8
  Top Layer w10: v1(1625,2680) 1655,2650 R31_1.1@1687,2650 ; U2_1.1@1627.5,2440 1647.5,2420 v1(1675,2420) C40_1.1@1710,2420 R58_1.1@1775,2420 1800,2420 1860,2360 R54_1.2@1870,2360
  Mid-Layer 2 w10: v1(1625,2680) 1675,2630 v1(1675,2420)
NetC40_1_2: C40_1.2 R53_1.1 R58_1.2 R59_1.2 U2_1.4 | length 393.6
  Top Layer w10: R53_1.1@1480,2369 1509,2340 U2_1.4@1552.5,2340 1557,2335.5 R59_1.2@1557,2283 1570,2283 1587.5,2300.5 1651,2300.5 1710,2359.5 C40_1.2@1710,2360 R58_1.2@1775,2360
NetC40_2_1: C40_2.1 R31_2.1 R54_2.2 R58_2.1 U2_2.1 | length 630.8
  Top Layer w10: v1(1627,2059) 1657,2029 R31_2.1@1689,2029 ; U2_2.1@1629.5,1819 1649.5,1799 v1(1677,1799) C40_2.1@1712,1799 R58_2.1@1777,1799 1802,1799 1862,1739 R54_2.2@1872,1739
  Mid-Layer 2 w10: v1(1627,2059) 1677,2009 v1(1677,1799)
NetC40_2_2: C40_2.2 R53_2.1 R58_2.2 R59_2.2 U2_2.4 | length 393.6
  Top Layer w10: R53_2.1@1482,1748 1511,1719 U2_2.4@1554.5,1719 1559,1714.5 R59_2.2@1559,1662 1572,1662 1589.5,1679.5 1653,1679.5 1712,1738.5 C40_2.2@1712,1739 R58_2.2@1777,1739
NetC40_3_1: C40_3.1 R31_3.1 R54_3.2 R58_3.1 U2_3.1 | length 630.8
  Top Layer w10: v1(1632,1450) 1662,1420 R31_3.1@1694,1420 ; U2_3.1@1634.5,1210 1654.5,1190 v1(1682,1190) C40_3.1@1717,1190 R58_3.1@1782,1190 1807,1190 1867,1130 R54_3.2@1877,1130
  Mid-Layer 2 w10: v1(1632,1450) 1682,1400 v1(1682,1190)
NetC40_3_2: C40_3.2 R53_3.1 R58_3.2 R59_3.2 U2_3.4 | length 393.6
  Top Layer w10: R53_3.1@1487,1139 1516,1110 U2_3.4@1559.5,1110 1564,1105.5 R59_3.2@1564,1053 1577,1053 1594.5,1070.5 1658,1070.5 1717,1129.5 C40_3.2@1717,1130 R58_3.2@1782,1130
NetC40_4_1: C40_4.1 R31_4.1 R54_4.2 R58_4.1 U2_4.1 | length 630.8
  Top Layer w10: v1(1634,855) 1664,825 R31_4.1@1696,825 ; U2_4.1@1636.5,615 1656.5,595 v1(1684,595) C40_4.1@1719,595 R58_4.1@1784,595 1809,595 1869,535 R54_4.2@1879,535
  Mid-Layer 2 w10: v1(1634,855) 1684,805 v1(1684,595)
NetC40_4_2: C40_4.2 R53_4.1 R58_4.2 R59_4.2 U2_4.4 | length 393.6
  Top Layer w10: R53_4.1@1489,544 1518,515 U2_4.4@1561.5,515 1566,510.5 R59_4.2@1566,458 1579,458 1596.5,475.5 1660,475.5 1719,534.5 C40_4.2@1719,535 R58_4.2@1784,535
NetC43_1_1: C43_1.1 R57_1.1 R60_1.1 U5_1.4 | length 259.1
  Top Layer w10: R57_1.1@2165,2390 2144,2390 U5_1.4@2092,2338 2120,2310 C43_1.1@2165,2310 R60_1.1@2245,2310
NetC43_1_2: C43_1.2 R56_1.1 R60_1.2 U5_1.1 | length 662
  Top Layer w10: R56_1.1@1775,2285 1805,2315 1919,2315 U5_1.1@1942,2338 v1(1942,2397) v1@1945,2400 ; C43_1.2@2165,2250 v1(2205,2250) R60_1.2@2245,2250 R60_1.2@2250,2250
  Mid-Layer 1 w10: v1@1949.5,2404.5 1949.5,2395.5 1970,2375 2005,2375 2130,2250 v1(2205,2250)
NetC43_2_1: C43_2.1 R57_2.1 R60_2.1 U5_2.4 | length 259.1
  Top Layer w10: R57_2.1@2167,1769 2146,1769 U5_2.4@2094,1717 2122,1689 C43_2.1@2167,1689 R60_2.1@2247,1689
NetC43_2_2: C43_2.2 R56_2.1 R60_2.2 U5_2.1 | length 662
  Top Layer w10: R56_2.1@1777,1664 1807,1694 1921,1694 U5_2.1@1944,1717 v1(1944,1776) v1@1947,1779 ; C43_2.2@2167,1629 v1(2207,1629) R60_2.2@2247,1629 R60_2.2@2252,1629
  Mid-Layer 1 w10: v1@1951.5,1783.5 1951.5,1774.5 1972,1754 2007,1754 2132,1629 v1(2207,1629)
NetC43_3_1: C43_3.1 R57_3.1 R60_3.1 U5_3.4 | length 259.1
  Top Layer w10: R57_3.1@2172,1160 2151,1160 U5_3.4@2099,1108 2127,1080 C43_3.1@2172,1080 R60_3.1@2252,1080
NetC43_3_2: C43_3.2 R56_3.1 R60_3.2 U5_3.1 | length 662
  Top Layer w10: R56_3.1@1782,1055 1812,1085 1926,1085 U5_3.1@1949,1108 v1(1949,1167) v1@1952,1170 ; C43_3.2@2172,1020 v1(2212,1020) R60_3.2@2252,1020 R60_3.2@2257,1020
  Mid-Layer 1 w10: v1@1956.5,1174.5 1956.5,1165.5 1977,1145 2012,1145 2137,1020 v1(2212,1020)
NetC43_4_1: C43_4.1 R57_4.1 R60_4.1 U5_4.4 | length 259.1
  Top Layer w10: R57_4.1@2174,565 2153,565 U5_4.4@2101,513 2129,485 C43_4.1@2174,485 R60_4.1@2254,485
NetC43_4_2: C43_4.2 R56_4.1 R60_4.2 U5_4.1 | length 662
  Top Layer w10: R56_4.1@1784,460 1814,490 1928,490 U5_4.1@1951,513 v1(1951,572) v1@1954,575 ; C43_4.2@2174,425 v1(2214,425) R60_4.2@2254,425 R60_4.2@2259,425
  Mid-Layer 1 w10: v1@1958.5,579.5 1958.5,570.5 1979,550 2014,550 2139,425 v1(2214,425)
NetC47_1_2: C47_1.2 R70_1.1 U1_1.3 | length 367
  Top Layer w10: C47_1.2@2828,2541 2828,2463 R70_1.1@2829,2462 2870,2421 2870,2358 2883,2345 2918,2345 2950,2377 U1_1.3@2950,2445
NetC47_2_2: C47_2.2 R70_2.1 U1_2.3 | length 367
  Top Layer w10: C47_2.2@2830,1920 2830,1842 R70_2.1@2831,1841 2872,1800 2872,1737 2885,1724 2920,1724 2952,1756 U1_2.3@2952,1824
NetC47_3_2: C47_3.2 R70_3.1 U1_3.3 | length 367
  Top Layer w10: C47_3.2@2835,1311 2835,1233 R70_3.1@2836,1232 2877,1191 2877,1128 2890,1115 2925,1115 2957,1147 U1_3.3@2957,1215
NetC47_4_2: C47_4.2 R70_4.1 U1_4.3 | length 367
  Top Layer w10: C47_4.2@2835,720 2835,642 R70_4.1@2836,641 2877,600 2877,537 2890,524 2925,524 2957,556 U1_4.3@2957,624
NetC48_1_2: C48_1.2 R49_1.2 | length 71.7
  Top Layer w10: R49_1.2@3123,2412 3132,2421 C48_1.2@3191,2421
NetC48_2_2: C48_2.2 R49_2.2 | length 71.7
  Top Layer w10: R49_2.2@3125,1791 3134,1800 C48_2.2@3193,1800
NetC48_3_2: C48_3.2 R49_3.2 | length 71.7
  Top Layer w10: R49_3.2@3130,1182 3139,1191 C48_3.2@3198,1191
NetC48_4_2: C48_4.2 R49_4.2 | length 71.7
  Top Layer w10: R49_4.2@3130,591 3139,600 C48_4.2@3198,600
NetC49_1_1: C49_1.1 R24_1.2 R25_1.1 R41_1.1 | length 378.4
  Bottom Layer w10: R24_1.2@3398.5,2245 3398.5,2236 R41_1.1@3456.5,2178 ; R41_1.1@3456.5,2177 3517.5,2177 3518.5,2178 ; R25_1.1@3560.5,2238 3536.5,2238 3518.5,2220 3518.5,2178 ; C49_1.1@3611.5,2107 3574.5,2144 3533.5,2144 3518.5,2159 3518.5,2178
NetC49_2_1: C49_2.1 R24_2.2 R25_2.1 R41_2.1 | length 376.4
  Bottom Layer w10: R24_2.2@3398.5,1620 3398.5,1611 R41_2.1@3456.5,1553 ; R41_2.1@3456.5,1552 3517.5,1552 3518.5,1553 ; R25_2.1@3560.5,1613 3536.5,1613 3518.5,1595 3518.5,1553 ; C49_2.1@3611.5,1482 3574.5,1519 3537,1519 3518.5,1537.5 3518.5,1553
NetC49_3_1: C49_3.1 R24_3.2 R25_3.1 R41_3.1 | length 372.2
  Bottom Layer w10: R24_3.2@3398.5,999 3398.5,990 R41_3.1@3456.5,932 ; R41_3.1@3456.5,931 3517.5,931 3518.5,932 ; R25_3.1@3560.5,992 3536.5,992 3518.5,974 3518.5,932 ; C49_3.1@3611.5,861 3574.5,898 3544.06,898 3518.5,923.56 3518.5,932
NetC49_4_1: C49_4.1 R24_4.2 R25_4.1 R41_4.1 | length 374.4
  Bottom Layer w10: R24_4.2@3398.5,375 3398.5,366 R41_4.1@3456.5,308 ; R41_4.1@3456.5,307 3517.5,307 3518.5,308 ; R25_4.1@3560.5,368 3536.5,368 3518.5,350 3518.5,308 ; C49_4.1@3611.5,237 3574.5,274 3540.37,274 3518.5,295.87 3518.5,308
NetC50_1_1: C50_1.1 R26_1.2 R27_1.1 | length 164.9
  Bottom Layer w10: R27_1.1@3479.5,2384 R26_1.2@3549.5,2384 3609.5,2324 C50_1.1@3609.5,2314
NetC50_2_1: C50_2.1 R26_2.2 R27_2.1 | length 164.9
  Bottom Layer w10: R27_2.1@3479.5,1759 R26_2.2@3549.5,1759 3609.5,1699 C50_2.1@3609.5,1689
NetC50_3_1: C50_3.1 R26_3.2 R27_3.1 | length 164.9
  Bottom Layer w10: R27_3.1@3479.5,1138 R26_3.2@3549.5,1138 3609.5,1078 C50_3.1@3609.5,1068
NetC50_4_1: C50_4.1 R26_4.2 R27_4.1 | length 164.9
  Bottom Layer w10: R27_4.1@3479.5,514 R26_4.2@3549.5,514 3609.5,454 C50_4.1@3609.5,444
NetC52_1_2: C52_1.2 U7_1.1 | length 156.5
  Top Layer w10: C52_1.2@2408,2347 2432,2347 2479,2300 U7_1.1@2479,2234
NetC52_2_2: C52_2.2 U7_2.1 | length 156.5
  Top Layer w10: C52_2.2@2410,1726 2434,1726 2481,1679 U7_2.1@2481,1613
NetC52_3_2: C52_3.2 U7_3.1 | length 156.5
  Top Layer w10: C52_3.2@2415,1117 2439,1117 2486,1070 U7_3.1@2486,1004
NetC52_4_2: C52_4.2 U7_4.1 | length 156.5
  Top Layer w10: C52_4.2@2415,526 2439,526 2486,479 U7_4.1@2486,413
NetC54_1_2: C54_1.2 L7_1.2 L8_1.1 | length 137
  Top Layer w10: C54_1.2@2697,2463 L7_1.2@2697,2600
NetC54_2_2: C54_2.2 L7_2.2 L8_2.1 | length 137
  Top Layer w10: C54_2.2@2699,1842 L7_2.2@2699,1979
NetC54_3_2: C54_3.2 L7_3.2 L8_3.1 | length 137
  Top Layer w10: C54_3.2@2704,1233 L7_3.2@2704,1370
NetC54_4_2: C54_4.2 L7_4.2 L8_4.1 | length 171.1
  Top Layer w10: L8_4.1@2670,774 2670,764 2704,730 L7_4.2@2704,710 ; C54_4.2@2704,642 L7_4.2@2704,710 ; L7_4.2@2729,710 L7_4.2@2704,710
NetC55_2: C55.2 C56.2 L4.1 U12.4 | length 1621
  Top Layer w25: C56.2@4102,838 4282,1018 4384,1018 ; C55.2@4221,241 L4.1@4303,241 4303,292 4348,337 4348,705 4319,734 4319,818 4408,907 4408,994 4384,1018 ; U12.4@4407.01,1336.5 4407.01,1193.27 4384,1170.26 4384,1018
NetC57_2: C57.2 R68.2 U12.2 | length 397.6
  Top Layer w25: R68.2@4016,1125 C57.2@4090,1125 4190,1225 4252,1225 4272.99,1245.99 U12.2@4272.99,1336.5
NetC58_1_1: C58_1.1 Q1_1.3 R63_1.2 | length 249.5
  Bottom Layer w10: Q1_1.3@1233,2368.5 1269.5,2368.5 C58_1.1@1301,2400 1307,2406 1307,2529 1296,2540 R63_1.2@1276,2540 R63_1.2@1275,2541
NetC58_2_1: C58_2.1 Q1_2.3 R63_2.2 | length 249.5
  Bottom Layer w10: Q1_2.3@1233,1748.5 1269.5,1748.5 C58_2.1@1301,1780 1307,1786 1307,1909 1296,1920 R63_2.2@1276,1920 R63_2.2@1275,1921
NetC58_3_1: C58_3.1 Q1_3.3 R63_3.2 | length 249.5
  Bottom Layer w10: Q1_3.3@1233,1123.5 1269.5,1123.5 C58_3.1@1301,1155 1307,1161 1307,1284 1296,1295 R63_3.2@1276,1295 R63_3.2@1275,1296
NetC58_4_1: C58_4.1 Q1_4.3 R63_4.2 | length 249.5
  Bottom Layer w10: Q1_4.3@1233,503.5 1269.5,503.5 C58_4.1@1301,535 1307,541 1307,664 1296,675 R63_4.2@1276,675 R63_4.2@1275,676
NetC59_1_1: C59_1.1 Q1_1.2 R7_1.2 | length 141
  Bottom Layer w10: C59_1.1@1131,2540 R7_1.2@1131,2470 1131,2423 Q1_1.2@1148,2406
NetC59_2_1: C59_2.1 Q1_2.2 R7_2.2 | length 141
  Bottom Layer w10: C59_2.1@1131,1920 R7_2.2@1131,1850 1131,1803 Q1_2.2@1148,1786
NetC59_3_1: C59_3.1 Q1_3.2 R7_3.2 | length 141
  Bottom Layer w10: C59_3.1@1131,1295 R7_3.2@1131,1225 1131,1178 Q1_3.2@1148,1161
NetC59_4_1: C59_4.1 Q1_4.2 R7_4.2 | length 141
  Bottom Layer w10: C59_4.1@1131,675 R7_4.2@1131,605 1131,558 Q1_4.2@1148,541
NetDP1_2: DP1.2 R85.1 | length 66.5
  Top Layer w10: DP1.2@4554.82,2640.6 4554.82,2706.82 R85.1@4555,2707
NetJ1_38: J1.38 J1.39 R42.2 R73.2 | length 3666.3
  Top Layer w25: J1.38@223.69,221.75 549.59,221.75 632.84,305 R73.2@726.57,305 ; J1.39@223.69,2721.75 549.59,2721.75 630.84,2803 R42.2@709.57,2803
  Bottom Layer w10: J1.38@549.59,221.75 J1.38@549.59,227.98
  Bottom Layer w25: J1.38@549.59,227.98 417.57,360 417.57,2589.73 J1.39@549.59,2721.75
NetJ2_38: J2.38 J2.39 R17.2 R66.2 | length 3790
  Top Layer w25: R66.2@4946,2804 5037.24,2804 J2.39@5118.98,2722.25
  Bottom Layer w25: R17.2@4908,218 5120.73,218 J2.38@5124.82,222.09 ; J2.39@5118.98,2722.09 5439,2402.07 J2.38@5439,219 ; J2.38@5124.98,222.25 J2.38@5124.82,222.09 ; 5439,450 5211.09,222.09 J2.38@5124.82,222.09 ; 5439.89,2399.07 J2.39@5439.89,2719.25
NetL1_1_2: L1_1.2 R12_1.2 R13_1.2 | length 139.9
  Top Layer w10: R13_1.2@3252,2286 3252,2224 R12_1.2@3259,2217 L1_1.2@3327,2217
NetL1_2_2: L1_2.2 R12_2.2 R13_2.2 | length 139.9
  Top Layer w10: R13_2.2@3254,1665 3254,1603 R12_2.2@3261,1596 L1_2.2@3329,1596
NetL1_3_2: L1_3.2 R12_3.2 R13_3.2 | length 139.9
  Top Layer w10: R13_3.2@3259,1056 3259,994 R12_3.2@3266,987 L1_3.2@3334,987
NetL1_4_2: L1_4.2 R12_4.2 R13_4.2 | length 139.9
  Top Layer w10: R13_4.2@3259,465 3259,403 R12_4.2@3266,396 L1_4.2@3334,396
NetL2_1_2: L2_1.2 R77_1.2 | length 120.4
  Top Layer w10: L2_1.2@4652,2300 4700,2300 v1(4710,2310)
  Bottom Layer w10: v1(4710,2310) 4710,2340 R77_1.2@4730,2360
NetL2_1_5: L2_1.5 R78_1.1 | length 121.5
  Top Layer w10: v1(4815,2310) 4857,2310 L2_1.5@4867,2300
  Bottom Layer w10: R78_1.1@4790,2255 4790,2285 v1(4815,2310)
NetL2_2_2: L2_2.2 R77_2.2 | length 120.4
  Top Layer w10: L2_2.2@4652,1680 4700,1680 v1(4710,1690)
  Bottom Layer w10: v1(4710,1690) 4710,1720 R77_2.2@4730,1740
NetL2_2_5: L2_2.5 R78_2.1 | length 121.5
  Top Layer w10: v1(4815,1690) 4857,1690 L2_2.5@4867,1680
  Bottom Layer w10: R78_2.1@4790,1635 4790,1665 v1(4815,1690)
NetL2_3_2: L2_3.2 R77_3.2 | length 120.4
  Top Layer w10: L2_3.2@4652,1055 4700,1055 v1(4710,1065)
  Bottom Layer w10: v1(4710,1065) 4710,1095 R77_3.2@4730,1115
NetL2_3_5: L2_3.5 R78_3.1 | length 121.5
  Top Layer w10: v1(4815,1065) 4857,1065 L2_3.5@4867,1055
  Bottom Layer w10: R78_3.1@4790,1010 4790,1040 v1(4815,1065)
NetL2_4_2: L2_4.2 R77_4.2 | length 120.4
  Top Layer w10: L2_4.2@4652,435 4700,435 v1(4710,445)
  Bottom Layer w10: v1(4710,445) 4710,475 R77_4.2@4730,495
NetL2_4_5: L2_4.5 R78_4.1 | length 121.5
  Top Layer w10: v1(4815,445) 4857,445 L2_4.5@4867,435
  Bottom Layer w10: R78_4.1@4790,390 4790,420 v1(4815,445)
NetL8_1_2: L8_1.2 R64_1.1 R65_1.2 U7_1.6 | length 364.4
  Top Layer w10: L8_1.2@2637,2539 2575,2539 R64_1.1@2567,2531 2579,2519 U7_1.6@2579,2439 2579,2392 2642,2329 R65_1.2@2700,2329
NetL8_2_2: L8_2.2 R64_2.1 R65_2.2 U7_2.6 | length 364.4
  Top Layer w10: L8_2.2@2639,1918 2577,1918 R64_2.1@2569,1910 2581,1898 U7_2.6@2581,1818 2581,1771 2644,1708 R65_2.2@2702,1708
NetL8_3_2: L8_3.2 R64_3.1 R65_3.2 U7_3.6 | length 364.4
  Top Layer w10: L8_3.2@2644,1309 2582,1309 R64_3.1@2574,1301 2586,1289 U7_3.6@2586,1209 2586,1162 2649,1099 R65_3.2@2707,1099
NetL8_4_2: L8_4.2 R64_4.1 R65_4.2 U7_4.6 | length 364.4
  Top Layer w10: L8_4.2@2644,718 2582,718 R64_4.1@2574,710 2586,698 U7_4.6@2586,618 2586,571 2649,508 R65_4.2@2707,508
NetL9_1_2: L9_1.2 R44_1.2 R45_1.2 | length 137.5
  Top Layer w10: R45_1.2@3252,2353 3252,2415 R44_1.2@3258,2421 L9_1.2@3325,2421
NetL9_2_2: L9_2.2 R44_2.2 R45_2.2 | length 137.5
  Top Layer w10: R45_2.2@3254,1732 3254,1794 R44_2.2@3260,1800 L9_2.2@3327,1800
NetL9_3_2: L9_3.2 R44_3.2 R45_3.2 | length 137.5
  Top Layer w10: R45_3.2@3259,1123 3259,1185 R44_3.2@3265,1191 L9_3.2@3332,1191
NetL9_4_2: L9_4.2 R44_4.2 R45_4.2 | length 137.5
  Top Layer w10: R45_4.2@3259,532 3259,594 R44_4.2@3265,600 L9_4.2@3332,600
NetL11_1_2: L11_1.2 R79_1.2 | length 102.7
  Top Layer w10: L11_1.2@4650,2595 4650,2602 v1(4687,2639)
  Bottom Layer w10: v1(4687,2639) 4729,2639 R79_1.2@4730,2640
NetL11_1_5: L11_1.5 R80_1.1 | length 93
  Top Layer w10: v1(4819,2595) L11_1.5@4865,2595
  Bottom Layer w10: R80_1.1@4790,2560 4819,2589 v1(4819,2595)
NetL11_2_2: L11_2.2 R79_2.2 | length 102.7
  Top Layer w10: L11_2.2@4650,1975 4650,1982 v1(4687,2019)
  Bottom Layer w10: v1(4687,2019) 4729,2019 R79_2.2@4730,2020
NetL11_2_5: L11_2.5 R80_2.1 | length 93
  Top Layer w10: v1(4819,1975) L11_2.5@4865,1975
  Bottom Layer w10: R80_2.1@4790,1940 4819,1969 v1(4819,1975)